# Altium PCB PCB1.PcbDoc
Units mm, origin at the board's own origin, x right, y up, seen from the top; angles counter-clockwise.
Board outline 70.25 x 110.25 mm, 2 copper layers (Top Layer, Bottom Layer); 15 components, 14 nets, 82 pads, 0 vias.
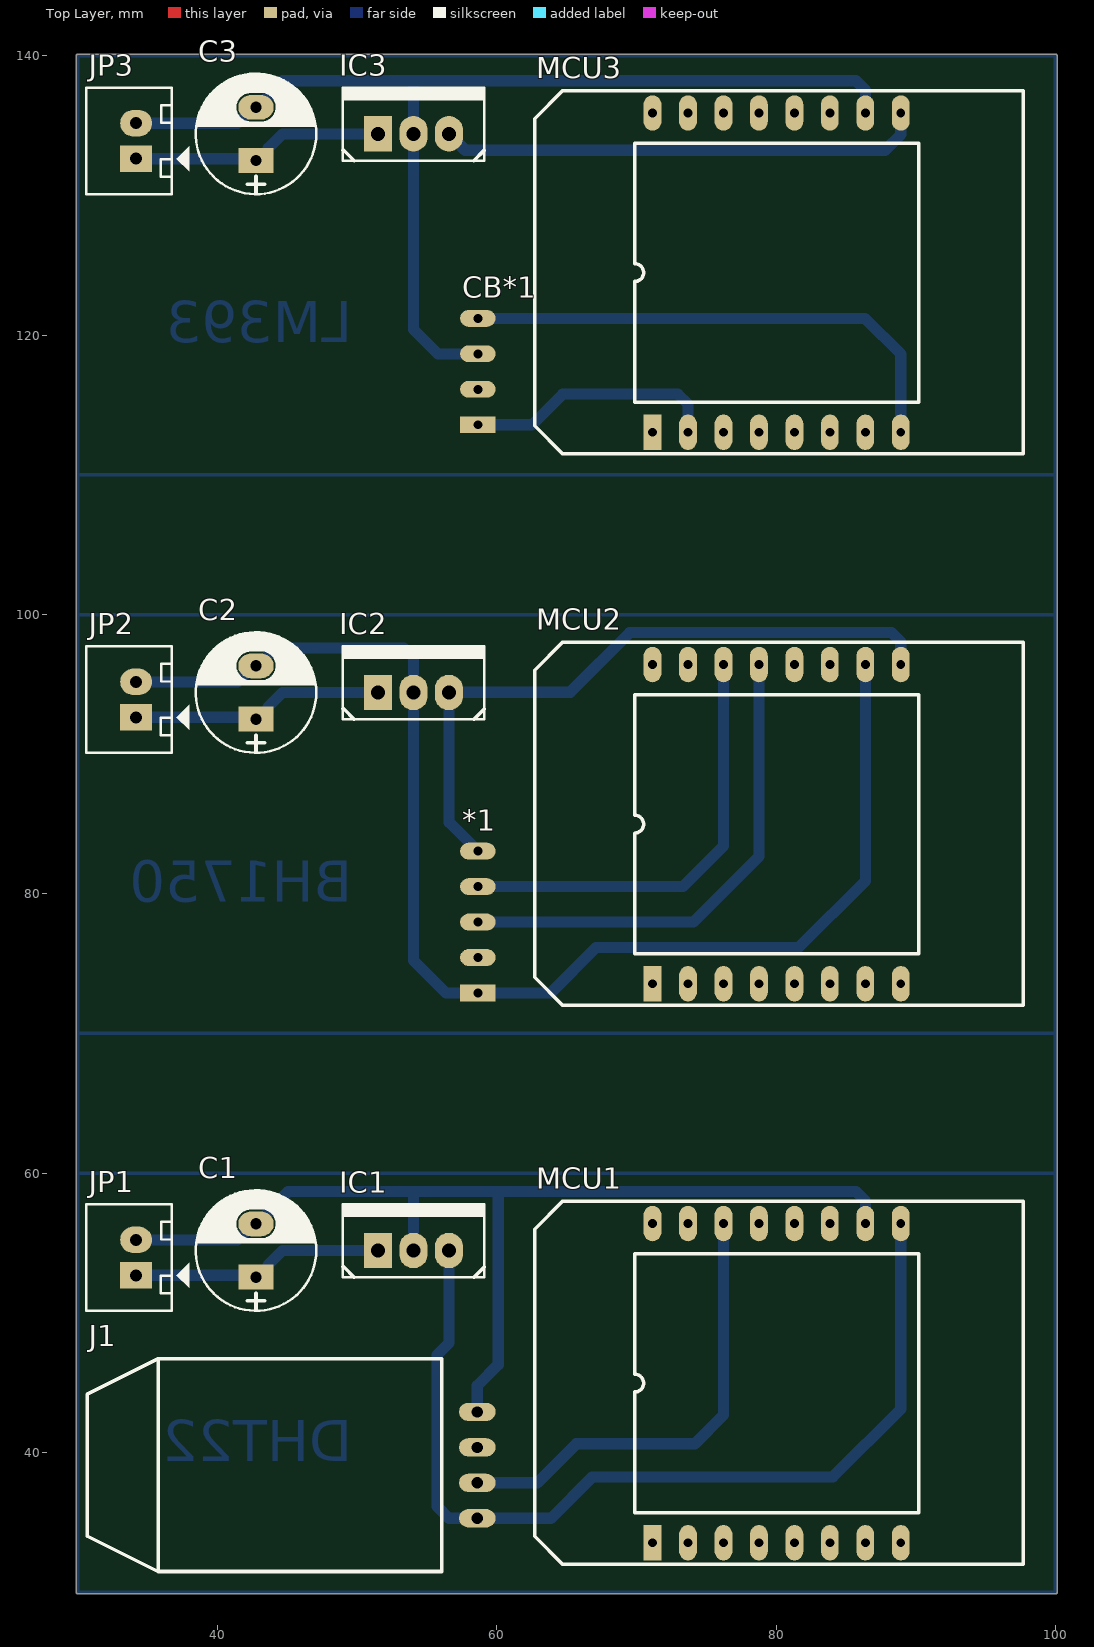
[diagram p0: Top Layer view]
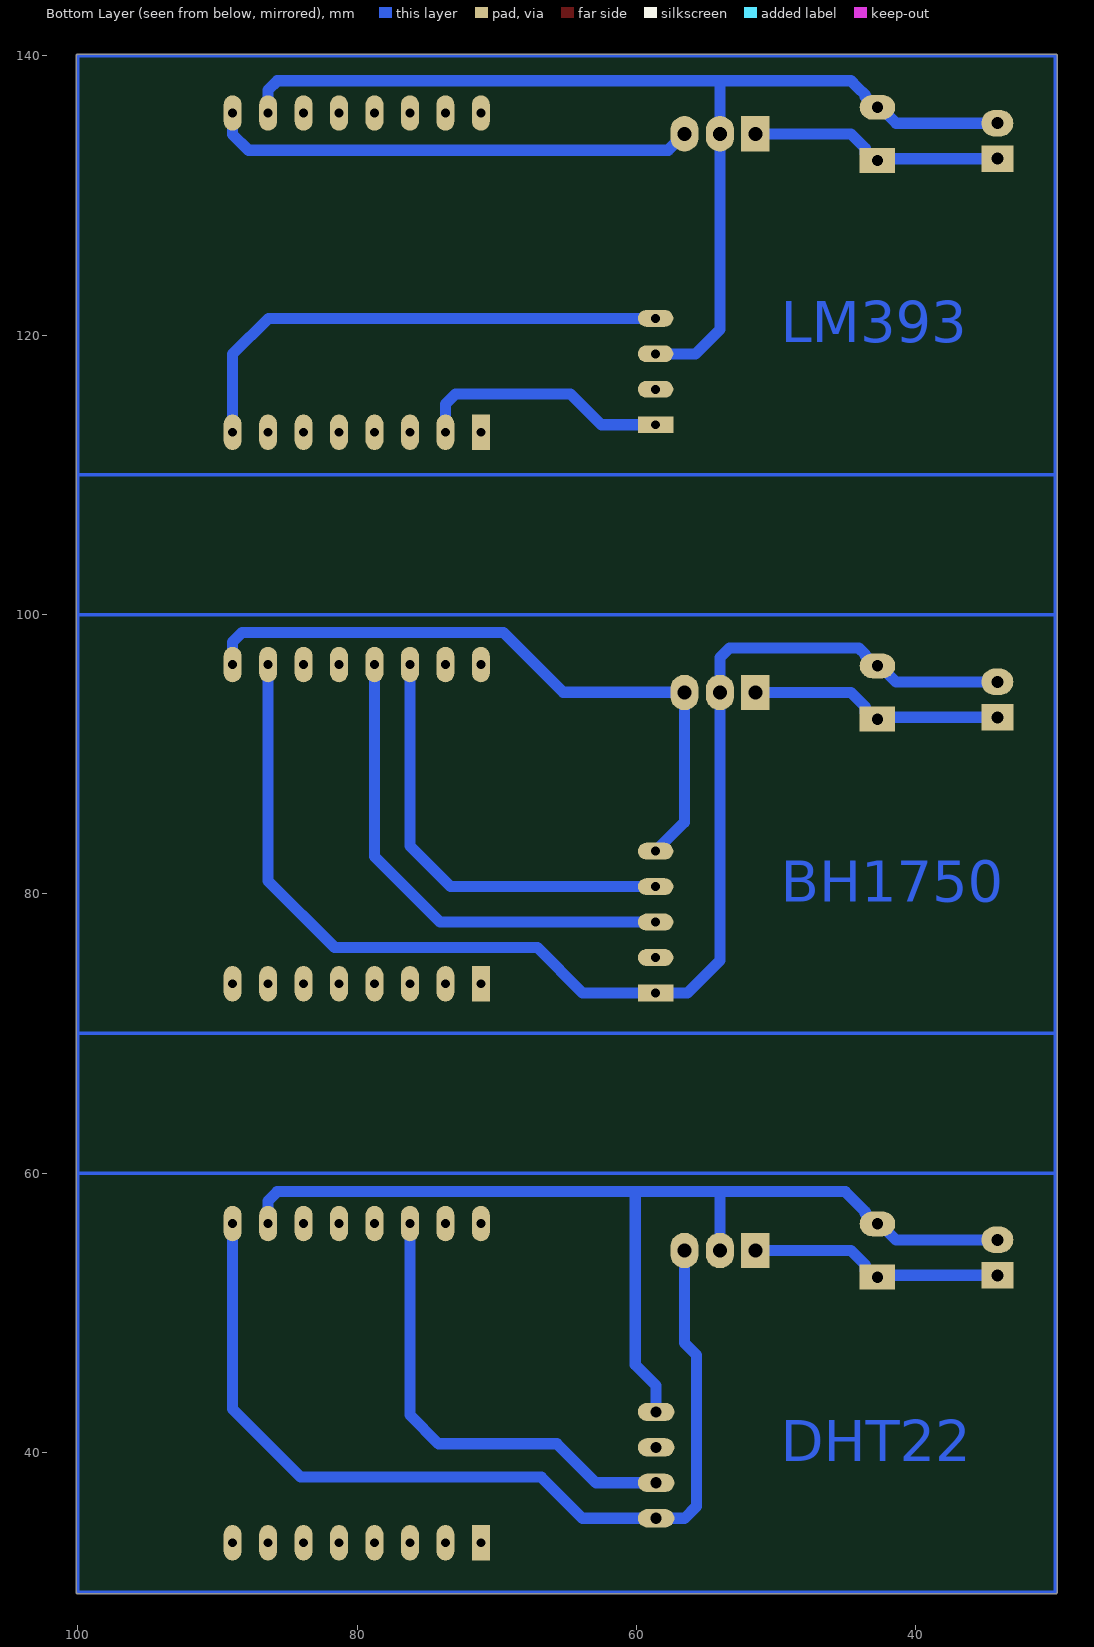
[diagram p1: Bottom Layer view, seen from below]
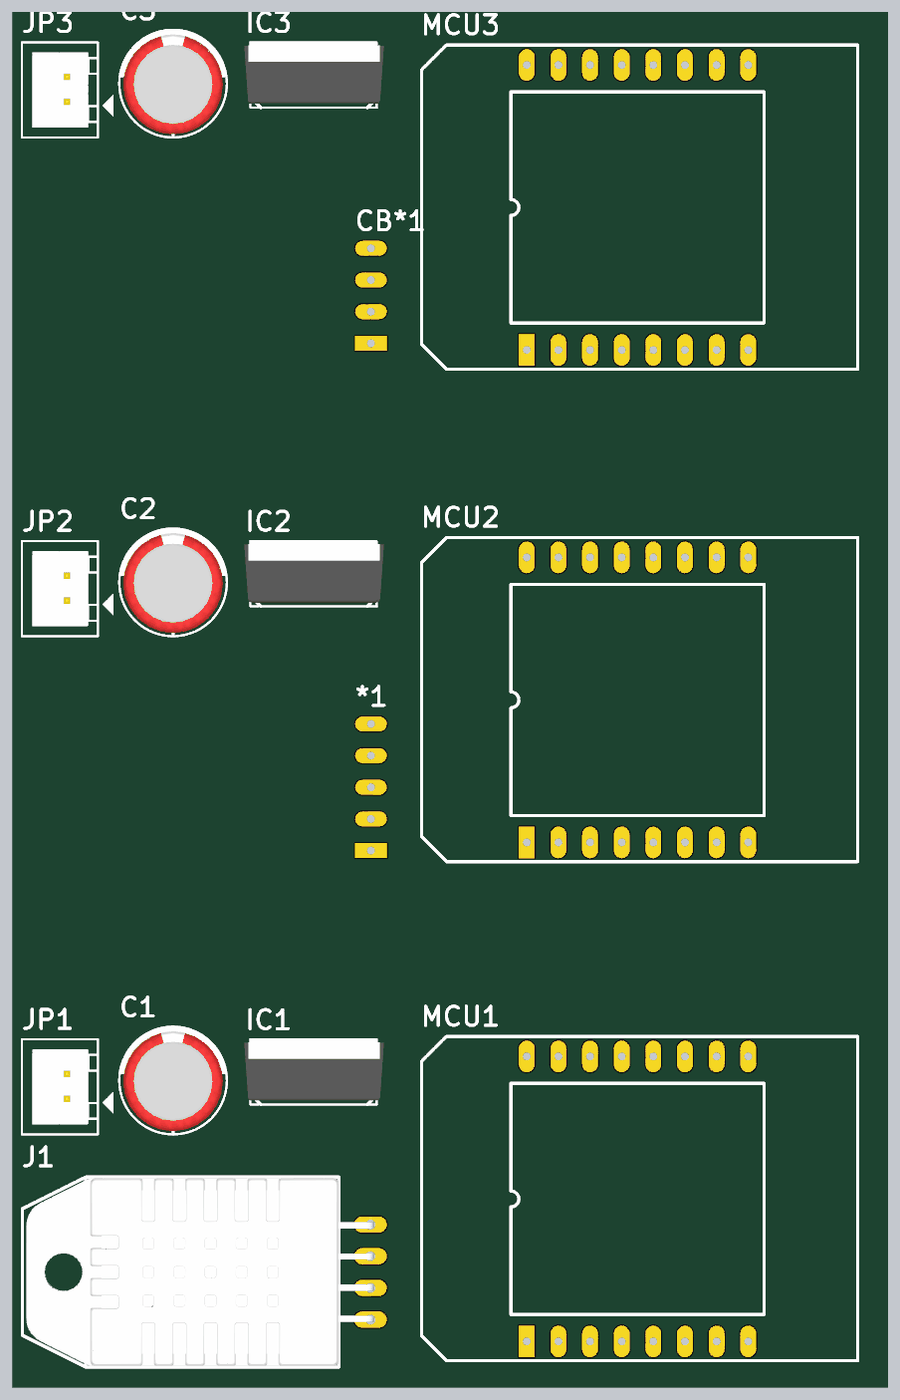
[diagram p2: 3D render of the assembled board from above, using the file's embedded part models]

## Layer stack, top to bottom
Top Solder: solder mask 0.0102, Solder Resist, Dk 3.5
Top Layer: signal copper 0.0356
Dielectric 1: dielectric 0.32, FR-4, Dk 4.8
Bottom Layer: signal copper 0.0356
Bottom Solder: solder mask 0.0102, Solder Resist, Dk 3.5

## Board outline
29.873,30 29.873,60 29.873,30 29.873,140 cw(c30,140) 30,140.127 100,140.127 cw(c100,140) 100.127,140 100.127,110 100.127,140 100.127,30 cw(c100,30) 100,29.873 30,29.873 cw(c30,30)

## Design rules (kind name [scope] priority, off if disabled: settings)
Clearance [All] p1: gap=0.4 ignorepadtopadclearanceinfootprint=FALSE
PolygonConnect [All] p1: connectstyle=Relief reliefconductorwidth=0.254 reliefentries=4 polygonreliefangle="90 Angle" airgapwidth=0.254
RoutingLayers [All] p1: top layer_v5=FALSE bottom layer_v5=TRUE
RoutingVias [All] p1: holewidth=0.711 width=1.27 viastyle="Through Hole" minholewidth=0.711 minwidth=1.27 maxholewidth=0.711 maxwidth=1.27
SolderMaskExpansion [All] p1: expansion=0.102 istentingtop=FALSE
Width [All] p1: maxlimit=0.8 minlimit=0.8 preferedwidth=0.8
29 further rules are at their usual default settings.

## Components (designator, comment, footprint, x,y, rotation, side; value= is the part's Value field where it differs from the comment)
*1 "BH1750" BH1750 58.636,72.898 r180 top
C1 "1000uF/16V" CP1.5/3.4 42.748,52.553 r90 top
C2 "1000uF/16V" CP1.5/3.4 42.748,92.512 r90 top
C3 "1000uF/16V" CP1.5/3.4 42.748,132.517 r90 top
CB*1 "Cam_bien_do_am_dat" "Am dat" 58.636,113.589 r180 top
IC1 "LM7805" QTO-220 51.486,54.458 r0 top
IC2 "LM7805" QTO-220 51.486,94.417 r0 top
IC3 "LM7805" QTO-220 51.486,134.422 r0 top
J1 "DHT22" DHT22 58.598,39.091 r90 top
JP1 "JP2" CON2 34.163,52.68 r90 top value="Connector 2"
JP2 "JP2" CON2 34.163,92.639 r90 top value="Connector 2"
JP3 "JP2" CON2 34.163,132.644 r90 top value="Connector 2"
MCU1 "ESP8266 D1 mini" "ESP D1 mini" 71.145,33.528 r90 top
MCU2 "ESP8266 D1 mini" "ESP D1 mini" 71.145,73.558 r90 top
MCU3 "ESP8266 D1 mini" "ESP D1 mini" 71.145,113.055 r90 top

## Footprints (in the part's own frame and the unit in brackets; to place one, negate y for a bottom-side part, rotate by r counter-clockwise, add the part's x,y. Pads: shape width x height; smd on the part's side, far side on the other; paste and mask are expansions set on the pad)
"Am dat" [mm]
  rect 2.54x1.2 hole 0.64: 1(0,0)
  oval 2.54x1.2 hole 0.64: 2(0,-2.54) 3(0,-5.08) 4(0,-7.62)
BH1750 [mm]
  rect 2.54x1.2 hole 0.64: 1(0,0)
  oval 2.54x1.2 hole 0.64: 2(0,-2.54) 3(0,-5.08) 4(0,-7.62) 5(0,-10.16)
CON2 [mil] "CON2"
  rect 75x90 hole 34: 1(0,0)
  oval 75x90 hole 34: 2(100,0)
  silkscreen extent -100,-150 200,140, body extent -68,-70 168,107, height 236
CP1.5/3.4 [mil] "Tu hoa 220->470uF,16V, 470uF/16V,25V"
  rect 70x100 hole 32: 1(0,0)
  oval 70x100 hole 32: 2(150,0)
  silkscreen extent -95,-170 245,170, body extent -85,-157 230,157, height 446
DHT22 [mm]
  oval 1.308x2.616 hole 0.8: DATA(-1.27,0) GND(3.81,0) NC(1.27,0) VDD(-3.81,0)
  silkscreen extent -7.62,2.54 7.62,27.94, body extent -7.55,-0.25 7.55,27.64, height 7.7
"ESP D1 mini" [mm]
  rect 2.54x1.27 hole 0.635: 1(0,0)
  oval 2.54x1.27 hole 0.635: 2(0,-2.54) 3(0,-5.08) 4(0,-7.62) 5(0,-10.16) 6(0,-12.7) 7(0,-15.24) 8(0,-17.78) 9(22.86,-17.78) 10(22.86,-15.24) 11(22.86,-12.7) 12(22.86,-10.16) 13(22.86,-7.62) 14(22.86,-5.08) 15(22.86,-2.54) 16(22.86,0)
  silkscreen extent -1.54,-26.55 24.46,8.45
QTO-220 [mil] "TO-220 - 1-2-3"
  rect 80x100 hole 39: 1(0,0)
  oval 80x100 hole 39: 2(100,0) 3(200,0)
  silkscreen extent -100,-76 300,130, body extent -119,-64 322,121, height 905

## Part data
C1 C2 C3: library part CP4, "Cap 1000uF/16V - 220uF/50V", Description 1="2200uF-3300uF/6,3V - 1000uF-2200uF/10V", Description 2="1000uF/16V - 470uF => 1000uF/25V - 100uF/100V", Description 3=330uF>470uF/35V_220uF>470uF/50V_10uF>22uF/250V, Description 4="220uF => 330uF/63V - 10uF =>33uF/160 - 200V", Description 5="4,7uF>10uF/250V_3,3uF>10uF/400V - 2,2uF>4,7uF/450V"
IC1 IC2 IC3: library part LM78xx, "On ap +, from + 5 to + 24VDC"
J1: "Capacitive-type humidity and temperature module/sensor", Package=Package, Check_prices=https://www.snapeda.com/parts/DHT22/Aosong+Electronics/view-part/?ref=eda, MF="Aosong Electronics", MP=DHT22, SnapEDA_Link=https://www.snapeda.com/parts/DHT22/Aosong+Electronics/view-part/?ref=snap
JP1 JP2 JP3: library part Con2, "Connector 2"

## Nets (pads, with @x,y where several pads share a name; then routed paths per layer and width w, separated by ;. In a path a pad name is that pad's centre, name@x,y a point inside that pad or via, vN(x,y) a via of type N, cw(c..) or ccw(c..) an arc to the next point about the centre after c; other vN are vias at no path point)
+5a: IC1.3 J1.VDD MCU1.9 | length 68.8
  Bottom Layer w0.8: IC1.3 56.566,47.828 55.702,46.965 55.702,36.144 56.566,35.281 J1.VDD 63.881,35.281 66.827,38.227 84.049,38.227 88.925,43.104 MCU1.9
+5b: *1.5 IC2.3 MCU2.9 | length 48.3
  Bottom Layer w0.8: *1.5 56.566,85.128 IC2.3 56.566,94.437 65.253,94.437 69.52,98.704 88.265,98.704 88.925,98.044 MCU2.9
+5c: IC3.3 MCU3.9 | length 34.8
  Bottom Layer w0.8: IC3.3 56.566,134.417 57.734,133.248 87.782,133.248 88.925,134.391 MCU3.9
GNDa: C1.2 IC1.2 J1.GND JP1.2 MCU1.10 | length 76.2
  Bottom Layer w0.8: JP1.2 41.41,55.22 42.553,56.363 42.865,56.363 43.616,57.114 43.616,57.23 45.06,58.674 54.026,58.674 ; IC1.2 54.026,58.674 ; J1.GND 58.598,44.78 60.096,46.279 60.096,58.674 ; MCU1.10 86.385,58.014 85.725,58.674 60.096,58.674 ; 54.026,58.674 60.096,58.674
GNDb: *1.1 C2.2 IC2.2 JP2.2 MCU2.10 | length 95
  Bottom Layer w0.8: JP2.2 41.41,95.179 42.553,96.322 C2.2 42.865,96.322 43.618,97.076 43.618,97.144 44.087,97.612 53.34,97.612 54.026,96.926 IC2.2 54.026,75.235 56.363,72.898 *1.1 63.856,72.898 67.107,76.149 81.61,76.149 86.385,80.924 MCU2.10
GNDc: C3.2 CB*1.3 IC3.2 JP3.2 MCU3.10 | length 78.7
  Bottom Layer w0.8: JP3.2 41.41,135.184 42.553,136.327 C3.2 42.865,136.327 43.616,137.078 43.616,137.195 44.165,137.744 44.648,138.227 53.848,138.227 ; CB*1.3 55.778,118.669 54.026,120.421 IC3.2 54.026,138.049 53.848,138.227 ; MCU3.10 86.385,137.566 85.725,138.227 53.848,138.227
Net*1_3: *1.3 MCU2.13 | length 35.8
  Bottom Layer w0.8: *1.3 74.066,77.978 78.765,82.677 MCU2.13
Net*1_4: *1.4 MCU2.14 | length 31.8
  Bottom Layer w0.8: *1.4 73.33,80.518 76.225,83.414 MCU2.14
NetCB*1_1: CB*1.1 MCU3.2 | length 18.3
  Bottom Layer w0.8: CB*1.1 62.509,113.589 64.719,115.799 72.949,115.799 73.685,115.062 MCU3.2
NetCB*1_4: CB*1.4 MCU3.8 | length 36.9
  Bottom Layer w0.8: CB*1.4 86.36,121.209 88.925,118.643 MCU3.8
NetJ1_DATA: J1.DATA MCU1.14 | length 33.4
  Bottom Layer w0.8: J1.DATA 62.89,37.821 65.684,40.615 74.168,40.615 76.225,42.672 MCU1.14
VCCa: C1.1 IC1.1 JP1.1 | length 18.4
  Bottom Layer w0.8: JP1.1 42.621,52.68 C1.1 43.129,52.553 43.618,53.042 43.618,53.423 44.653,54.458 IC1.1
VCCb: C2.1 IC2.1 JP2.1 | length 18.4
  Bottom Layer w0.8: JP2.1 42.621,92.639 C2.1 43.129,92.512 43.618,93.001 43.618,93.382 44.653,94.417 IC2.1
VCCc: C3.1 IC3.1 JP3.1 | length 18.4
  Bottom Layer w0.8: JP3.1 42.621,132.644 C3.1 43.129,132.517 43.618,133.006 43.618,133.387 44.653,134.422 IC3.1
pads on no net: *1.2 CB*1.2 J1.NC MCU1.1 MCU1.2 MCU1.3 MCU1.4 MCU1.5 MCU1.6 MCU1.7 MCU1.8 MCU1.11 MCU1.12 MCU1.13 MCU1.15 MCU1.16 MCU2.1 MCU2.2 MCU2.3 MCU2.4 MCU2.5 MCU2.6 MCU2.7 MCU2.8 MCU2.11 MCU2.12 MCU2.15 MCU2.16 MCU3.1 MCU3.3 MCU3.4 MCU3.5 MCU3.6 MCU3.7 MCU3.11 MCU3.12 MCU3.13 MCU3.14 MCU3.15 MCU3.16
copper on no net: | length 960
  Bottom Layer w0.254: 30,30 100,30 ; 30,30 30,140 ; 30,30 100,30 ; 30,30 30,60 100,60 100,30 ; 30,140 100,140 ; 30,140 30,110 100,110 100,140 ; 30,140 100,140 ; 100,30 100,140 ; 30,70 30,100 100,100 100,70 30,70

## Other copper
Bottom Layer:
  text "LM393" at 49.657,118.543 h5
  text "BH1750" at 49.657,78.465 h5
  text "DHT22" at 49.657,38.384 h5